# EAGLE board CombinedBoard (EAGLE 9.6.2)

Size 26.65 x 25.07 mm. Coordinates in mm from the lower left corner, seen from the top.
Outline: 0,0 26.65,0 26.65,25.07 0,25.07 0,0
Copper layers (1*16): Top 0.035mm / dielectric 1.5mm / Bottom 0.035mm
Design rules "default": minimum track width 6mil, minimum drill 0.35mm, track to track 6mil, track to pad 6mil, pad to pad 6mil, via to via 6mil, smd to smd 6mil, copper to edge 40mil, drill to drill 6mil, minimum pad ring 10mil, minimum via ring 8mil, stop-mask expansion 4mil, vias tented up to drill 0mil, thermal gap 10mil

## Footprints (pad centres in the part's own frame; a part is rotated, then mirrored left to right if it is on the bottom)
0805-NO = smd 1.24 x 1.5: 1 -0.95,0; 2 0.95,0
SOD-323 = smd 1.35 x 0.8: A 1.27,0; C -1.27,0
1X04 = drill 1.016 long: 1 -3.81,0; 2 -1.27,0; 3 1.27,0; 4 3.81,0
SOT23-WIDE = smd 1 x 1.2: 1 -0.95,-1; 2 0.95,-1; 3 0,1
_0805MP = smd 1.2 x 1.3: 1 -1.016,0; 2 1.016,0
BME280 = smd 0.7 x 0.35: 1 1.025,0.975; 2 1.025,0.325; 3 1.025,-0.325; 4 1.025,-0.975; 5 -1.025,-0.975; 6 -1.025,-0.325; 7 -1.025,0.325; 8 -1.025,0.975
SOT23-5 = smd 0.55 x 1.2: 1 -0.95,-1.3; 2 0,-1.3; 3 0.95,-1.3; 4 0.95,1.3; 5 -0.95,1.3
LGA12_ST = smd 0.5 x 0.5: 1 1.6,-0.8; 2 0.8,-0.8; 3 0,-0.8; 4 -0.8,-0.8; 5 -1.6,-0.8; 6 -1.6,0; 7 -1.6,0.8; 8 -0.8,0.8; 9 0,0.8; 10 0.8,0.8; 11 1.6,0.8; 12 1.6,0

## Placement (x,y rotation side)
C1  10uF  [0805-NO]  22.86,10.16 180 top
C2  10µF  [0805-NO]  6.35,15.24 0 top
C3  10uF  [0805-NO]  21.59,2.54 180 top
C4  10µF  [0805-NO]  6.35,22.86 0 top
C5  0.1uF  [0805-NO]  11.43,22.86 0 top
D2  1N4148  [SOD-323]  8.89,2.54 180 bottom
JP3  [1X04]  2.54,11.43 90 top
Q1  BSS138  [SOT23-WIDE]  22.86,19.05 180 top
Q2  BSS138  [SOT23-WIDE]  17.78,19.05 180 top
Q3  BSS138  [SOT23-WIDE]  15.24,8.89 0 top
Q4  BSS138  [SOT23-WIDE]  3.81,5.08 0 top
R1  10K  [0805-NO]  3.81,2.54 180 top
R2  10K  [0805-NO]  15.24,6.35 180 top
R3  10K  [0805-NO]  22.86,21.59 0 top
R4  10K  [_0805MP]  13.97,3.81 90 top
R5  10K  [0805-NO]  17.78,21.59 0 top
R6  10K  [0805-NO]  22.86,16.51 180 top
R7  10K  [0805-NO]  19.05,7.62 270 top
R8  10K  [0805-NO]  10.16,8.89 270 top
R9  10K  [0805-NO]  17.78,16.51 0 top
R10  10K  [0805-NO]  10.16,16.51 270 top
R11  10K  [0805-NO]  11.43,20.32 180 top
U1  BME280  [BME280]  8.89,5.08 90 top
U2  MIC5225-3.3  [SOT23-5]  22.86,6.35 180 top
U3  VL53L0X  [LGA12_ST]  13.97,16.51 270 top
U4  MIC5225_2.8V  [SOT23-5]  6.35,19.05 0 top

## Library data of the parts
C1-C5 D2 Q1-Q4 R1-R11 U1-U4 = microbuilder
JP3 = pinhead

## Nets
2.8V: C4.1 C5.1 Q1.1 Q2.1 R3.2 R5.2 R10.2 R11.2 U3.1 U3.11 U4.5
3.3V: C3.1 Q3.1 Q4.1 R1.2 R2.2 R4.2 U1.6 U1.8 U2.5
5.0V: C1.1 C2.1 JP3.1 R6.2 R7.2 R8.2 R9.2 U2.1 U2.3 U4.1 U4.3
CS_3V: D2.A U1.2
CS_5V: D2.C
GND: C1.2 C2.2 C3.2 C4.2 C5.2 JP3.2 U1.1 U1.7 U2.2 U3.2 U3.3 U3.4 U3.6 U3.12 U4.2
GPIO: R11.1 U3.7
SCK_3V: Q3.2 R2.1 U1.4
SCL: JP3.4 Q2.3 Q3.3 R7.1 R9.1
SCL_2.8V: Q2.2 R5.1 U3.10
SDA: JP3.3 Q1.3 Q4.3 R6.1 R8.1
SDA_2.8V: Q1.2 R3.1 U3.9
SDI_3V: Q4.2 R1.1 U1.3
SDO/ADR_3V: R4.1 U1.5
XSHUT_2.8V: R10.1 U3.5

## Tracks (layer width: path | path; a pad name or v marks a point on that pad's centre or on a via)
2.8V  (10 unrouted)
3.3V  (8 unrouted)
5.0V  (10 unrouted)
CS_3V  (1 unrouted)
GND  (14 unrouted)
GPIO  (1 unrouted)
SCK_3V  (2 unrouted)
SCL  (4 unrouted)
SCL_2.8V  (2 unrouted)
SDA  (4 unrouted)
SDA_2.8V  (2 unrouted)
SDI_3V  (2 unrouted)
SDO/ADR_3V  (1 unrouted)
XSHUT_2.8V  (1 unrouted)